# Altium PCB 42CAN.PcbDoc (part 2 of 2)
Units mm, origin at the board's own origin, x right, y up, seen from the top; angles counter-clockwise.
Board outline 42 x 42 mm, 4 copper layers (Top Layer 1 2, GND, Bottom Layer, POWER), stack 0.746 mm thick; 118 components, 90 nets, 420 pads, 193 vias.
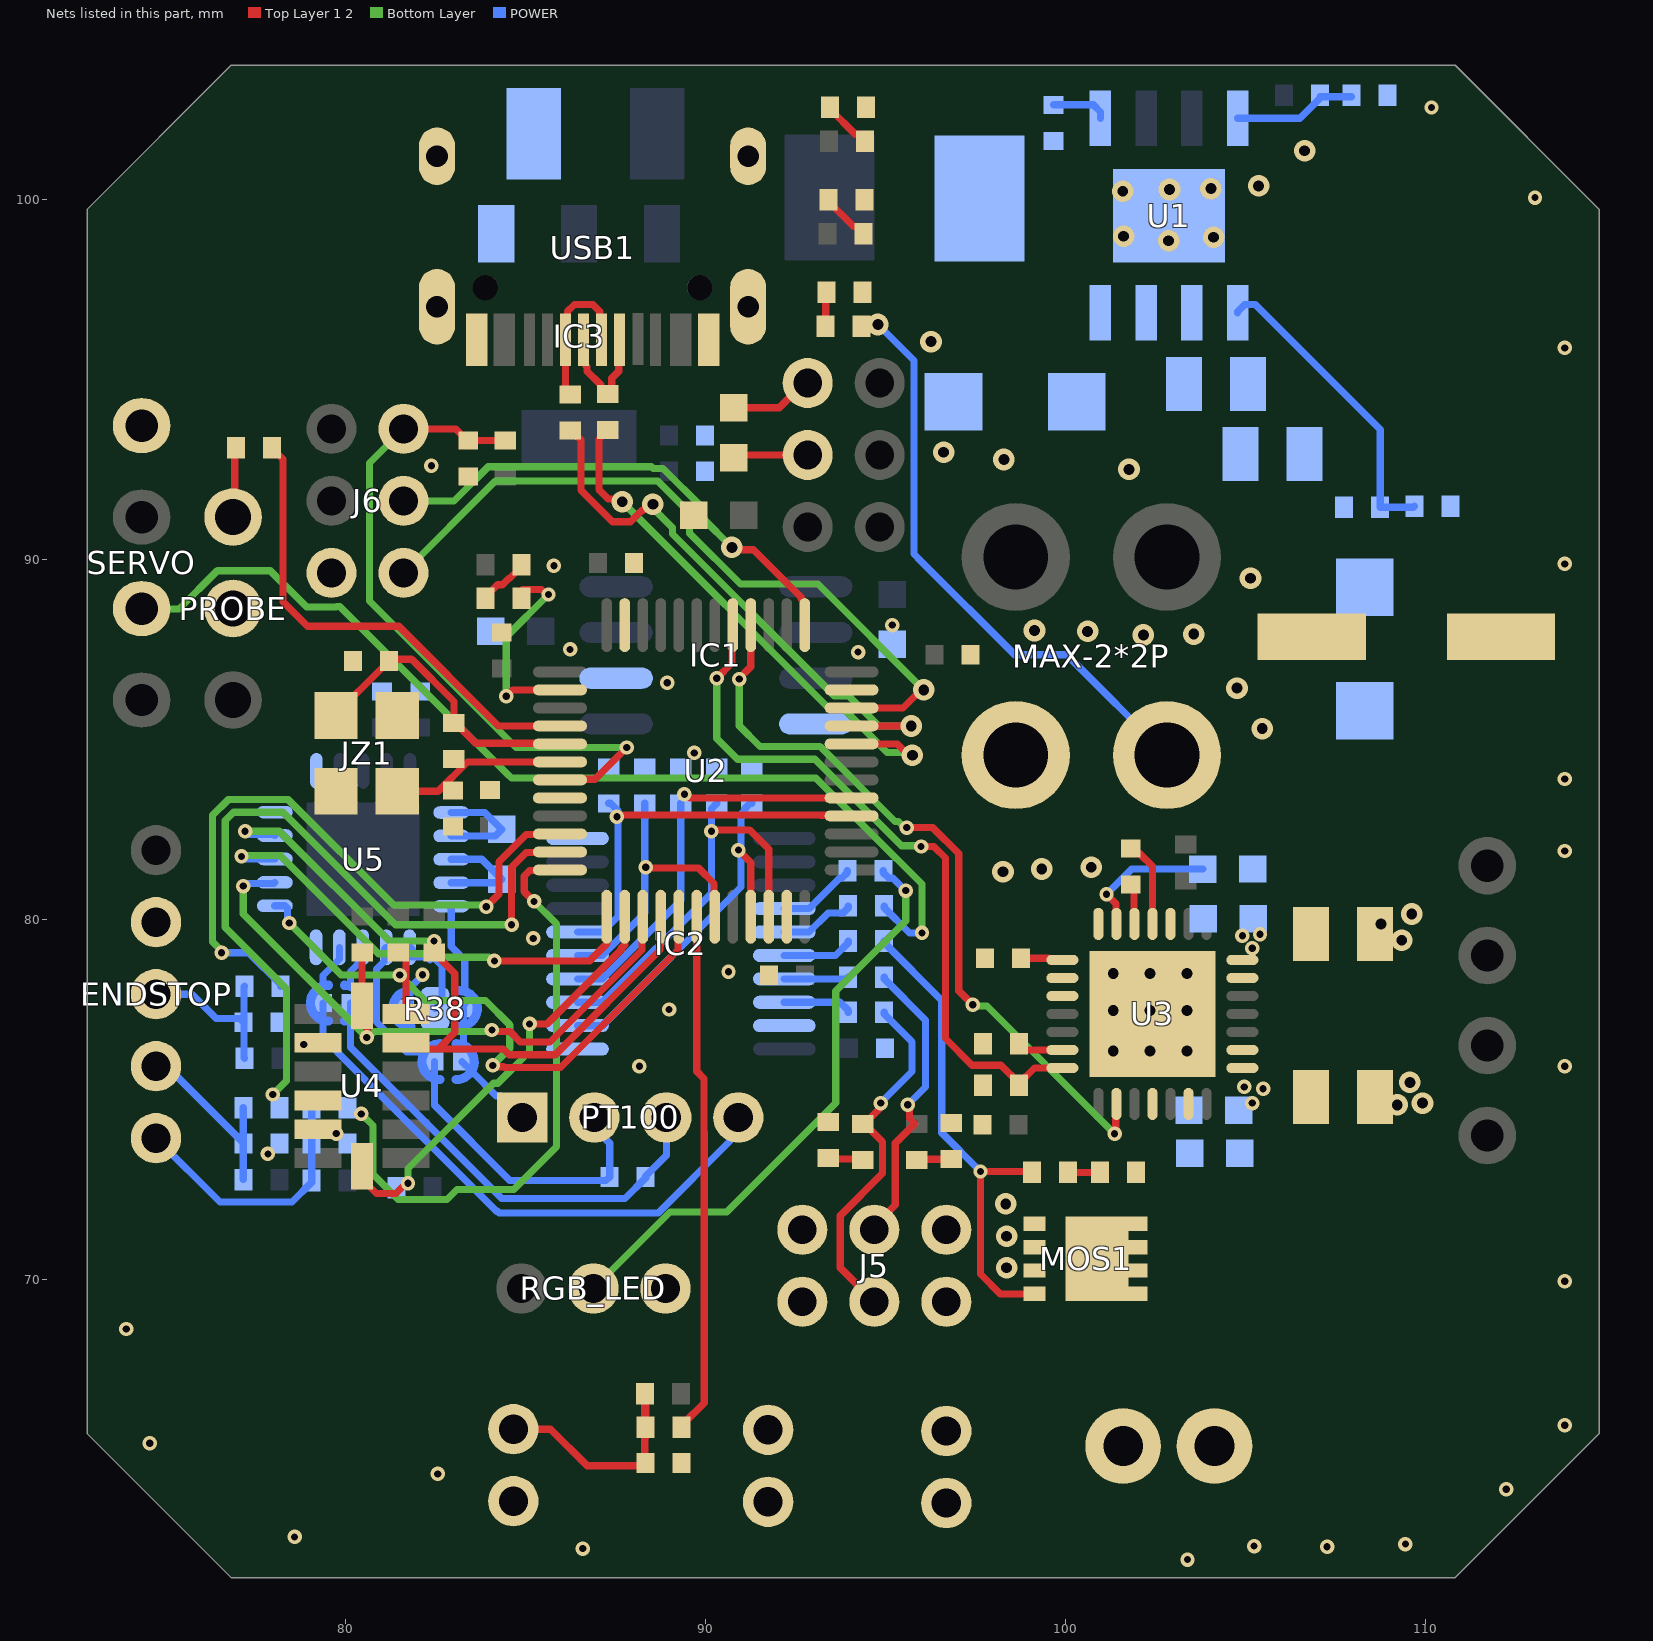
[diagram p3: the nets of this part, all layers, seen from the top]

## Via types
v1: diameter 0.4, hole 0.2, Top Layer 1 2 to POWER, tented both sides, 91 vias
v2: diameter 0.6, hole 0.3, Top Layer 1 2 to POWER, tented both sides, 64 vias
v3: diameter 0.8, hole 0.5, Top Layer 1 2 to POWER, 32 vias
v4: diameter 6.4, hole 3.2, Top Layer 1 2 to POWER, 4 vias
v5: diameter 0.406, hole 0.203, Top Layer 1 2 to POWER, tented both sides, 2 vias

## Nets (pads, with @x,y where several pads share a name; then routed paths per layer and width w, separated by ;. In a path a pad name is that pad's centre, name@x,y a point inside that pad or via, vN(x,y) a via of type N, cw(c..) or ccw(c..) an arc to the next point about the centre after c; other vN are vias at no path point) (continued)
ENDSTOP0: C32.1 ENDSTOP.3 R13.1 R29.1 | length 4.8
  POWER w0.2: ENDSTOP.3@74.75,77.925 75.75,77.925 76.425,77.25 77.078,77.25 C32.1@77.182,77.146 ; R29.1@77.207,76.146 77.195,76.159 77.195,77.134 C32.1@77.182,77.146 ; R13.1@77.207,78.146 77.195,78.134 77.195,77.158 C32.1@77.182,77.146
ENDSTOP1: C34.1 ENDSTOP.4 R14.1 R45.1 | length 5.3
  POWER w0.2: ENDSTOP.4@74.75,75.925 75.05,75.925 C34.1@77.175,73.8 ; R45.1@77.175,72.775 C34.1@77.175,73.775 C34.1@77.175,73.8 ; R14.1@77.175,74.775 C34.1@77.175,73.8
ENDSTOP2: C33.1 ENDSTOP.5 R30.1 R44.1 | length 7.4
  POWER w0.2: ENDSTOP.5@74.75,73.925 76.525,72.15 78.525,72.15 79.075,72.7 R44.1@79.075,72.75 C33.1@79.075,73.775 R30.1@79.075,74.775
FAN0: IC2.2 R23.2 U2.21 | length 10.6
  Top Layer 1 2 w0.2: v1(90.925,81.925) 91.269,81.581 U2.21@91.269,80.075
  POWER w0.2: IC2.2@86.458,77.05 87.147,77.05 91,80.903 91,82.925 91.1,83.025 91.1,83.075 91.25,83.225 R23.2@91.3,83.225
FAN0-BUFF: J5.5 R15.1 R31.1 | length 10.1
  Top Layer 1 2 w0.2: R31.1@94.375,74.325 R31.1@94.425,74.325 ; J5.5@94.7,69.381 93.753,70.329 93.753,71.774 94.928,72.949 94.928,73.823 R31.1@94.425,74.325 ; v5(94.875,74.9) 94.836,74.861 94.836,74.735 R31.1@94.425,74.325
  POWER w0.2: v5(94.875,74.9) 95.75,75.775 95.75,76.6 94.975,77.375 R15.1@94.975,77.425
FAN1: IC2.3 R24.2 U2.22 | length 11.2
  Top Layer 1 2 w0.2: v1(90.175,82.45) 90.213,82.488 91.237,82.488 91.769,81.956 U2.22@91.769,80.075
  POWER w0.2: IC2.3@86.458,77.7 87.147,77.7 90.175,80.728 v1(90.175,82.45) 90.175,83.075 R24.2@90.325,83.225
FAN1-BUFF: J5.2 R19.1 | length 8.3
  Top Layer 1 2 w0.2: J5.2@94.7,71.381 94.7,71.488 95.283,72.071 95.283,73.783 95.825,74.325 95.675,74.475 95.675,74.744 95.625,74.794 v5(95.625,74.85)
  POWER w0.2: R19.1@94.975,78.4 94.975,78.35 96.125,77.2 96.125,75.35 v5(95.625,74.85)
GND: C2.2 C3.2 C4.2 C5.1 C6.2 C9.2 C10.2 C11.1 C12.2 C13.2 C14.2 C15.2 C16.2 C17.2 C18.2 C19.2 C20.2 C21.2 C22.2 C23.2 C24.2 C25.2 C27.1 C28.1 C31.2 C32.2 C33.2 C34.2 D1.1 D2.2 D3.2 D4.2 D5.2 D8.2 D9.2 ENDSTOP.2 IC1.2 IC1.8 IC2.1 IC2.10 IC2.19 IC3.1 J5.3 J5.6 J6.6 JZ1.2 JZ1.4 MAX-2*2P.3 MOS1.1 MOS1.2 MOS1.3 PROBE.2 R5-DNP.1 R7.1 R9.2 R10.2 R11.1 R12.1 R23.1 R24.1 R25.1 R26.1 R27.1 R38.1 R49.2 RGB_LED.3 SERVO.1 TEMP0.2 U1.6 U1.9 U2.8 U2.23 U2.35 U2.47 U3.3 U3.7 U3.9 U3.10 U3.18 U3.20 U3.29 U4.2 U4.4 U4.5 U5.10 U5.15 U5.16 USB1.13 USB1.14 USB1.15 USB1.16 USB1.A1B12 USB1.B1A12 | length 1.1
  POWER w0.2: R38.1@81.664,77.525 81.8,77.661 81.8,78.023 81.8,78.097 82.151,78.448 v1(82.151,78.465)
  other v1: 103.399,62.219 86.6,62.525 105.249,62.594 107.275,62.575 109.45,62.65 78.6,62.85 112.25,64.175 82.575,64.6 74.575,65.45 113.875,65.95 73.925,68.625 113.875,69.95 77.858,73.489 79.754,74.052 88.175,75.925 113.875,75.925 78.854,76.527 89,77.5 90.65,78.55 85.225,79.475 113.875,81.9 113.875,83.9 89.7,84.625 88.95,86.575 94.25,87.425 86.25,87.5 95.2,88.175 85.8,89.825 113.875,89.875 82.4,92.6 113.875,95.875 113.05,100.05 110.175,102.55
  other v2: 98.375,70.325 98.375,71.2 98.35,72.1 109.225,74.85 109.925,74.9 109.575,75.475 101.337,76.349 102.362,76.349 103.387,76.349 101.337,77.474 102.362,77.474 103.387,77.474 101.337,78.499 102.362,78.499 103.387,78.499 109.35,79.425 108.775,79.875 109.625,80.15 98.275,81.325 99.35,81.4 100.725,81.45 102.175,87.9 103.575,87.925 100.625,88 99.15,88.025 105.15,89.475 101.775,92.5 98.3,92.775 96.625,92.975 96.275,96.05 102.875,98.85 104.125,98.95 101.625,98.975 101.6,100.225 102.9,100.275 104.05,100.3 105.375,100.375 106.65,101.35
HEAT0: IC2.4 R25.2 U2.29 | length 11.2
  Top Layer 1 2 w0.2: v1(89.425,83.475) 89.479,83.475 89.579,83.375 U2.29@94.069,83.375
  POWER w0.2: IC2.4@86.458,78.35 87.147,78.35 89.325,80.528 R25.2@89.325,83.225
HEAT0-BUFF: MOS1.4 R20.1 R28.1 | length 13.5
  Top Layer 1 2 w0.2: R28.1@99.075,72.975 99.05,73 v1(97.65,73) 97.65,70.15 98.2,69.6 MOS1.4@99.15,69.6
  POWER w0.2: R20.1@94.975,79.4 94.975,79.35 96.575,77.75 96.575,74.075 v1(97.65,73)
Net1_2: 1.2 C1.2 D1.2 U1.8
NetC1_1: C1.1 U1.1 | length 1.6
  POWER w0.2: C1.1@99.675,102.625 100.78,102.625 100.98,102.425 U1.1@100.98,102.25
NetC3_1: C3.1 C4.1 D6.2 R3-DNP.2 U1.7
NetC5_2: C5.2 JZ1.1 R6.2 U2.5 | length 8.2
  Top Layer 1 2 w0.2: JZ1.1@79.748,85.661 79.748,85.711 81.037,87 81.075,87 81.225,87.15 C5.2@81.225,87.175 ; C5.2@81.275,87.225 81.85,87.225 83.025,86.05 R6.2@83.025,85.45 83.075,85.45 83.631,84.894 84.531,84.894 85.95,84.894 U2.5@85.969,84.875
NetC6_1: C6.1 JZ1.3 R6.1 U2.6 | length 4.9
  Top Layer 1 2 w0.2: JZ1.3@81.448,83.561 82.586,83.561 83.4,84.375 U2.6@85.969,84.375
NetC7_1: C7.1 U3.4 | length 2.4
  Top Layer 1 2 w0.2: C7.1@101.825,81.975 101.975,81.825 102.075,81.825 102.425,81.475 U3.4@102.425,79.875
NetC7_2: C7.2 U3.5 | length 1.1
  Top Layer 1 2 w0.2: C7.2@101.825,80.975 101.91,80.891 101.91,79.89 U3.5@101.925,79.875
NetC8_1: C8.1 U3.6 | length 3.9
  Top Layer 1 2 w0.2: v1(101.15,80.7) 101.409,80.441 101.409,79.89 U3.6@101.424,79.875
  POWER w0.2: v1(101.15,80.7) 101.85,81.4 C8.1@103.825,81.4
NetC12_1: C12.1 U3.8 | length 1.2
  Top Layer 1 2 w0.2: C12.1@98.775,78.925 99.546,78.925 99.595,78.876 U3.8@99.925,78.876
NetC14_1: C14.1 R16.1 R17.2 TEMP0.1 | length 6.9
  Top Layer 1 2 w0.2: TEMP0.1@84.676,65.843 85.707,65.843 86.725,64.825 88.275,64.825 C14.1@88.35,64.9 C14.1@88.35,64.925 ; C14.1@88.325,64.925 88.325,66.6 R16.1@88.35,66.625 ; R17.2@88.35,65.625 R16.1@88.35,66.625 ; R16.1@88.35,66.65 R16.1@88.35,66.625
NetC26_1: C26.1 PT100.2 R39.2 U5.7 | length 12.7
  POWER w0.2: U5.7@81.145,79.225 81.099,79.179 81.099,78.849 80.875,78.625 80.875,77.15 81.705,76.32 82.219,76.32 ; R39.2@82.489,76.05 82.489,75.574 82.489,74.836 84.575,72.75 87.25,72.75 C26.1@87.35,72.85 87.35,73.783 86.925,74.208 PT100.2@86.925,74.5
NetC26_2: C26.2 PT100.3 R40.1 U5.8 | length 14.9
  POWER w0.2: R40.1@80.15,77.675 80.15,77.203 80.15,76.45 84.35,72.25 87.775,72.25 88.35,72.825 C26.2@88.35,72.85 88.35,72.875 88.925,73.45 PT100.3@88.925,74.5 PT100.3@88.925,74.814 ; 80.15,78.147 80.15,78.557 80.491,78.898 80.491,79.221 U5.8@80.495,79.225
NetCJ2_2: CJ2.2 MOS1.5
NetD2_1: D2.1 R28.2 | length 0.9
  Top Layer 1 2 w0.2: R28.2@100.075,72.975 D2.1@100.975,72.975
NetD3_1: D3.1 R31.2 | length 1
  Top Layer 1 2 w0.2: D3.1@93.425,73.375 93.45,73.35 94.35,73.35 R31.2@94.375,73.325
NetD4_1: D4.1 R32.2 | length 1
  Top Layer 1 2 w0.2: R32.2@95.875,73.325 95.889,73.339 96.819,73.339 D4.1@96.833,73.353
NetD5_1: D5.1 R41.1 | length 1.4
  Top Layer 1 2 w0.2: D5.1@93.469,102.56 93.469,102.51 94.169,101.81 94.294,101.81 R41.1@94.444,101.66
NetD7_1: D7.1 R46.2 | length 1.6
  Top Layer 1 2 w0.2: D7.1@83.903,88.917 83.903,88.967 84.233,89.298 84.376,89.298 84.548,89.47 84.569,89.47 84.9,89.8 R46.2@84.9,89.85 ; R46.2@84.812,89.938 R46.2@84.925,90.05
NetD7_2: D7.2 U2.2 | length 5.7
  Top Layer 1 2 w0.2: v1(84.475,86.2) 84.65,86.375 U2.2@85.969,86.375 ; D7.2@84.928,89.167 85.454,89.167 85.596,89.025 v1(85.65,89.025)
  Bottom Layer w0.2: v1(84.475,86.2) 84.475,87.85 v1(85.65,89.025)
NetD8_1: D8.1 R47.1 | length 1
  Top Layer 1 2 w0.2: R47.1@93.35,96.475 93.35,97.4 D8.1@93.375,97.425
NetD9_1: D9.1 R48.1 | length 1.6
  Top Layer 1 2 w0.2: D9.1@93.428,99.992 93.428,99.942 94.12,99.25 94.25,99.25 R48.1@94.4,99.1 ; R48.1@94.4,98.925 R48.1@94.425,98.9 ; R48.1@94.4,98.975 R48.1@94.4,99.1 ; R48.1@94.4,99.05 94.4,99.075 94.425,99.1 R48.1@94.4,99.1
NetFAN0_1: FAN0.1 J5.4
NetFAN1_1: FAN1.1 J5.1
NetIC2_14: IC2.14 R22.2 | length 2.2
  POWER w0.2: IC2.14@92.2,80.3 92.889,80.3 93.739,81.15 93.8,81.15 93.95,81.3 R22.2@93.95,81.35
NetIC2_15: IC2.15 R21.2 | length 2.1
  POWER w0.2: IC2.15@92.2,79.65 92.889,79.65 93.414,80.175 93.825,80.175 93.975,80.325 R21.2@93.975,80.375
NetIC2_16: IC2.16 R20.2 | length 2
  POWER w0.2: IC2.16@92.2,79 93.625,79 93.975,79.35 R20.2@93.975,79.4
NetIC2_17: IC2.17 R19.2 | length 1.8
  POWER w0.2: IC2.17@92.2,78.35 93.925,78.35 R19.2@93.975,78.4
NetIC2_18: IC2.18 R15.2 | length 1.9
  POWER w0.2: IC2.18@92.2,77.7 93.75,77.7 93.975,77.475 R15.2@93.975,77.425
Netj3_2: j3.2 R18.2 | length 2.3
  Top Layer 1 2 w0.2: R18.2@90.802,94.209 92.059,94.209 92.75,94.9 j3.2@92.85,94.9
Netj4_1: j4.1 R18.1 | length 2.1
  Top Layer 1 2 w0.2: R18.1@90.8,92.825 90.875,92.9 j4.1@92.85,92.9
NetPT100_1: PT100.1 R38.3 R39.1 U5.5 | length 5.9
  POWER w0.2: U5.5@82.95,80.369 82.95,79.25 83.325,78.875 83.325,78.126 ; R39.1@83.25,76.05 83.513,75.787 84.2,75.1 84.325,75.1 PT100.1@84.925,74.5 ; 83.294,76.505 83.294,77.151 83.294,77.165 83.294,77.619 R38.3@83.325,77.65
NetPT100_4: PT100.4 R40.2 U5.9 | length 17.1
  POWER w0.2: R40.2@79.389,77.675 79.389,77.199 79.389,76.736 79.798,76.327 79.798,76.304 84.204,71.898 84.227,71.898 84.275,71.85 88.7,71.85 90.695,73.845 90.695,74.27 PT100.4@90.925,74.5 ; 79.389,78.151 79.389,78.446 79.845,78.902 U5.9@79.845,79.225
NetR1_1: R1.1 USB1.A6 USB1.B6 | length 4.2
  Top Layer 1 2 w0.2: R1.1@86.25,94.575 86.125,94.7 USB1.B6@86.125,96.103 86.175,96.152 86.175,96.884 86.37,97.08 86.88,97.08 87.075,96.884 87.075,96.152 USB1.A6@87.125,96.103
NetR2_1: R2.1 USB1.A7 USB1.B7 | length 3.5
  Top Layer 1 2 w0.2: USB1.A7@86.625,96.103 86.675,96.053 86.675,95.4 86.723,95.352 86.723,95.228 87.1,94.85 87.1,94.75 87.25,94.6 87.35,94.6 87.408,94.658 87.408,95.033 87.602,95.227 87.602,96.079 USB1.B7@87.625,96.103
NetR3-DNP_1: R3-DNP.1 R5-DNP.2 U1.5 | length 8.6
  POWER w0.2: U1.5@104.79,96.85 104.79,96.879 104.99,97.079 105.278,97.079 107.05,95.307 108.75,93.607 R3-DNP.1@108.75,91.45 109.675,91.45 R5-DNP.2@109.7,91.475
NetR4_1: R4.1 R7.2 U1.4 | length 3.4
  POWER w0.2: U1.4@104.79,102.25 106.525,102.25 107.075,102.8 107.075,102.85 R7.2@107.95,102.85
NetR9_1: R9.1 U3.27
NetR10_1: R10.1 U3.23
NetR11_2: R11.2 U3.13 | length 1.3
  Top Layer 1 2 w0.2: R11.2@98.725,76.55 98.725,76.524 98.875,76.374 U3.13@99.925,76.374
NetR13_2: R13.2 U2.10 | length 18.6
  Top Layer 1 2 w0.2: v1(83.925,80.35) 84.273,80.698 84.273,81.596 85.032,82.356 85.95,82.356 U2.10@85.969,82.375
  Bottom Layer w0.2: v1@76.725,79.075 v1(76.573,79.075) 76.573,79.129 76.32,79.382 76.32,82.894 76.754,83.327 78.423,83.327 81.35,80.4 v1@83.984,80.4
  POWER w0.2: v1(76.573,79.075) 77.328,79.075 78.207,78.196 R13.2@78.207,78.146
NetR14_2: R14.2 U2.11 | length 20.9
  Top Layer 1 2 w0.2: v1(84.625,79.85) 84.625,81.45 85.031,81.856 85.95,81.856 U2.11@85.969,81.875
  Bottom Layer w0.2: v1(77.992,75.138) 78.375,75.521 78.375,78.075 76.673,79.777 76.673,82.748 76.9,82.975 78.275,82.975 81.4,79.85 82.285,79.85 82.288,79.852 82.662,79.852 82.665,79.85 v1(84.625,79.85)
NetR30_2: R30.2 U2.12 | length 16.8
  Top Layer 1 2 w0.2: v1(85.25,80.5) 84.977,80.773 84.977,81.208 85.125,81.356 85.931,81.356 U2.12@85.96,81.385
  Bottom Layer w0.2: v1(80.45,74.6) 80.775,74.275 80.775,72.925 81.477,72.223 82.833,72.223 83.113,72.502 84.684,72.502 85.877,73.695 85.877,79.873 v1(85.25,80.5)
NetR37_1: R37.1 U5.1 U5.2 | length 3.1
  POWER w0.2: U5.2@82.95,82.32 84.17,82.32 R37.1@84.35,82.5 83.88,82.97 U5.1@82.95,82.97
NetR37_2: R37.2 U5.3 U5.4 | length 3.1
  POWER w0.2: U5.4@82.95,81.02 84.256,81.02 R37.2@84.352,81.116 83.797,81.67 U5.3@82.95,81.67
NetR38_2: R38.2 U5.6 | length 2.3
  POWER w0.2: U5.6@81.795,79.225 81.865,79.156 81.865,78.965 82.27,78.965 82.362,78.873 ; R38.2@82.5,77.525 82.692,77.717 82.692,78.708 82.527,78.873
NetR43_2: R43.2 U2.4 | length 13.5
  Top Layer 1 2 w0.2: R43.2@77.975,93.1 77.975,93.05 78.125,92.9 78.158,92.9 78.275,92.783 78.275,88.825 78.959,88.141 81.491,88.141 84.258,85.375 U2.4@85.969,85.375
PROBE: PROBE.1 R43.1 | length 2.1
  Top Layer 1 2 w0.2: PROBE.1@76.95,91.005 76.938,91.017 76.938,93.063 R43.1@76.975,93.1
RESET: C31.1 J6.3 R42.2 U2.7 | length 19.5
  Top Layer 1 2 w0.2: J6.3@81.625,93.625 83.075,93.625 83.4,93.3 C31.1@83.425,93.3 ; C31.1@83.256,93.15 83.406,93.3 C31.1@83.425,93.3 ; R42.2@84.5,93.3 C31.1@83.425,93.3 ; U2.7@85.969,83.875 85.988,83.894 86.944,83.894 v1(87.825,84.775)
  Bottom Layer w0.2: J6.3@81.625,93.625 80.678,92.678 80.678,88.847 84.75,84.775 v1(87.825,84.775)
RGB: IC2.6 R27.2 U2.28 | length 11.1
  Top Layer 1 2 w0.2: v1(87.55,82.85) 87.604,82.85 87.657,82.902 93.221,82.902 93.229,82.894 94.05,82.894 U2.28@94.069,82.875
  POWER w0.2: IC2.6@86.458,79.65 87.147,79.65 87.581,80.084 87.581,83.019 87.375,83.225 R27.2@87.325,83.225
RGB-BUFF: R22.1 RGB_LED.2 | length 16.4
  Bottom Layer w0.2: RGB_LED.2@86.9,69.75 89.025,71.875 90.6,71.875 93.63,74.905 93.63,78.011 95.573,79.954 v1(95.573,80.8)
  POWER w0.2: R22.1@94.95,81.35 94.95,81.3 95.1,81.15 95.216,81.15 95.566,80.8 v1(95.573,80.8)
SERVO: IC2.5 R26.2 U2.19 | length 8.4
  Top Layer 1 2 w0.2: v1@88.35,81.425 89.827,81.425 90.25,81.002 90.25,80.094 U2.19@90.269,80.075
  POWER w0.2: IC2.5@86.458,79 87.147,79 88.325,80.178 R26.2@88.325,83.225
  other v1: 88.35,81.45
SERVO0-BUFF: R21.1 SERVO.3 | length 28.5
  Bottom Layer w0.2: SERVO.3@74.35,88.635 74.36,88.625 75.392,88.625 76.454,89.687 77.925,89.687 78.935,88.678 79.765,88.678 79.765,88.688 79.779,88.688 79.862,88.688 84.564,83.986 ; 84.564,83.986 84.623,83.927 93.074,83.927 95.308,81.693 95.319,81.693 96.025,80.987 v1(96.025,79.625)
  POWER w0.2: R21.1@94.975,80.375 94.975,80.325 95.675,79.625 v1(96.025,79.625)
SPI1_CS0: U2.13 U5.13 | length 13.3
  Top Layer 1 2 w0.2: v1(84.15,78.85) 86.794,78.85 87.269,79.325 U2.13@87.269,80.075
  Bottom Layer w0.2: v1(77.125,81.75) 77.15,81.775 78.2,81.775 80.927,79.048 82.188,79.048 82.288,78.948 83.998,78.948 84.096,78.85 v1(84.15,78.85)
  POWER w0.2: v1(77.125,81.75) 77.179,81.75 77.249,81.68 U5.13@78.05,81.68
SPI1_CS1: R36.1 U2.14 U4.7 | length 12.2
  Top Layer 1 2 w0.2: U4.7@80.47,73.145 80.47,72.795 80.877,72.388 81.408,72.388 81.696,72.675 v1(81.75,72.675) ; v1(85.125,77.1) 85.613,77.1 87.672,79.158 87.672,79.2 87.769,79.298 U2.14@87.769,80.075
  Bottom Layer w0.2: v1(81.75,72.675) 81.75,73.082 84.12,75.452 84.245,75.452 85.125,76.333 v1(85.125,77.1)
SPI1_MISO: R35.2 U2.16 U4.12 U5.14 | length 19.8
  Top Layer 1 2 w0.2: U4.12@81.69,76.575 81.865,76.4 82.609,76.4 84.4,76.4 84.557,76.243 85.841,76.243 88.75,79.152 88.75,80.056 U2.16@88.769,80.075 ; R35.2@82.475,79.075 82.525,79.075 82.675,78.925 82.675,78.875 83.05,78.5 83.05,76.859 82.6,76.409
  Bottom Layer w0.2: v1(77.225,82.45) 78.175,82.45 81.225,79.4 v1(82.475,79.4)
  POWER w0.2: v1(77.225,82.45) 77.279,82.45 77.37,82.359 78.021,82.359 U5.14@78.05,82.33
SPI1_MOSI: R34.2 U2.17 U4.13 U5.11 | length 18.7
  Top Layer 1 2 w0.2: R34.2@81.475,79.075 81.525,79.075 81.69,78.91 U4.13@81.69,77.375 ; v1(84.1,75.948) 84.138,75.909 84.392,75.909 84.411,75.89 85.987,75.89 89.25,79.153 89.25,80.056 U2.17@89.269,80.075
  Bottom Layer w0.2: v1(78.45,79.9) 79.896,78.454 v1(81.517,78.454) 82.221,77.75 83.9,77.75 84.578,77.072 84.578,76.425 v1(84.1,75.948)
  POWER w0.2: U5.11@78.05,80.38 78.333,80.38 78.402,80.31 78.402,80.002 78.45,79.954 v1(78.45,79.9)
SPI1_SCK: R33.2 U2.15 U4.14 U5.12 | length 18.8
  Top Layer 1 2 w0.2: R33.2@80.475,79.075 80.47,79.07 U4.14@80.47,77.605 80.602,77.473 v1(80.602,76.725) ; v1(84.08,76.93) 84.118,76.892 84.572,76.892 84.869,76.595 85.695,76.595 88.25,79.15 88.25,80.056 U2.15@88.269,80.075
  Bottom Layer w0.2: v1(77.175,80.925) 77.175,80.152 v1(80.602,76.725) 80.653,76.725 80.82,76.892 84.042,76.892 v1(84.08,76.93)
  POWER w0.2: v1(77.175,80.925) 77.229,80.925 77.305,81.001 78.021,81.001 U5.12@78.05,81.03
STEP: U2.40 U3.16 | length 21.1
  Top Layer 1 2 w0.2: v1@90.9,86.65 91.269,87.019 U2.40@91.269,88.175 ; v1@95.625,82.55 96.327,82.55 97.048,81.829 97.048,78.017 v1(97.432,77.632) ; v1(101.375,74.05) 101.409,74.084 101.409,74.859 U3.16@101.424,74.875
  Bottom Layer w0.2: v1(90.95,86.675) 90.95,85.377 91.525,84.802 93.196,84.802 95.276,82.723 95.373,82.723 95.546,82.55 v1(95.6,82.55) ; v1(97.432,77.632) 97.471,77.594 97.831,77.594 v1(101.375,74.05)
SWCLK: J6.2 U2.37 | length 13.4
  Top Layer 1 2 w0.2: v2(90.745,90.333) 90.81,90.268 91.345,90.268 92.672,88.942 92.672,88.9 92.75,88.821 U2.37@92.75,88.673
  Bottom Layer w0.2: J6.2@81.625,91.625 83.025,91.625 83.975,92.575 88.503,92.575 88.551,92.527 88.833,92.527 89.92,91.44 89.92,91.158 v2(90.745,90.333)
SWDIO: J6.1 U2.34 | length 20.5
  Top Layer 1 2 w0.2: U2.34@94.069,85.875 95.494,85.875 95.994,86.375 v2(96.075,86.375)
  Bottom Layer w0.2: J6.1@81.625,89.625 84.175,92.175 88.687,92.175 89.568,91.294 89.568,90.729 90.983,89.313 93.137,89.313 v2(96.075,86.375)
"T0 TEMP": R17.1 U2.18 | length 14.5
  Top Layer 1 2 w0.2: R17.1@89.35,65.9 89.35,65.95 89.673,66.273 89.679,66.273 89.975,66.568 89.975,74.103 89.973,74.106 89.973,75.577 89.769,75.781 U2.18@89.769,80.075
UART: R12.2 U2.41 U3.14 | length 20.1
  Top Layer 1 2 w0.2: v1(90.325,86.7) 90.75,87.125 90.75,88.156 U2.41@90.769,88.175 ; v1(96,82.025) 96.353,82.025 96.675,81.703 96.675,76.693 97.416,75.953 98.222,75.953 R12.2@98.725,75.45 ; R12.2@98.725,75.4 R12.2@98.725,75.45 ; U3.14@99.925,75.874 99.149,75.874 R12.2@98.725,75.45
  Bottom Layer w0.2: v1(90.325,86.7) 90.325,85.025 90.9,84.45 93.05,84.45 95.454,82.046 95.979,82.046 v1(96,82.025)
"USB DM": R2.2 U2.32 | length 15.4
  Top Layer 1 2 w0.2: R2.2@87.3,93.6 87.25,93.6 87.1,93.45 87.1,93.383 87.05,93.333 87.05,91.94 87.313,91.677 87.623,91.677 v2(87.7,91.6) ; U2.32@94.069,84.875 95.336,84.875 95.651,84.56 v2(95.76,84.56)
  Bottom Layer w0.2: v2(87.7,91.6) 93.44,85.86 93.837,85.86 95.061,84.636 95.683,84.636 v2(95.76,84.56)
"USB DP": R1.2 U2.33 | length 15.9
  Top Layer 1 2 w0.2: R1.2@86.3,93.575 86.55,93.325 86.55,91.925 87.427,91.048 87.929,91.048 88.231,91.35 88.263,91.35 88.443,91.53 v2(88.551,91.53) ; U2.33@94.069,85.375 v2@95.726,85.374
  Bottom Layer w0.2: v2(88.551,91.53) 88.551,91.422 89.092,90.881 89.092,90.706 93.586,86.212 93.983,86.212 94.821,85.374 v2(95.726,85.374)
VCC: C8.2 C9.1 C10.1 C11.2 C22.1 CJ2.1 D6.1 FAN0.2 FAN1.2 MAX-2*2P.4 R47.2 U3.22 U3.28 | length 16.1
  POWER w0.2: v2(94.8,96.525) 95.8,95.525 95.8,90.15 96,89.95 98.6,87.35 100.043,87.35 MAX-2*2P.4@102.829,84.565
  other v1: 105.2,74.9 105.5,75.3 104.975,75.35 105.2,79.2 104.925,79.55 105.412,79.588
  other v2: 105.475,85.3 104.775,86.425
pads on no net: IC2.7 IC2.8 IC2.9 IC2.11 IC2.12 IC2.13 R32.1 U1.2 U1.3 U2.3 U2.26 U2.27 U2.30 U2.31 U2.42 U2.43 U3.12 U3.17 U3.25 U4.3 U4.8 U4.9 U4.10 U4.11 U5.17 U5.18 U5.21 USB1. USB1.A5 USB1.A8 USB1.B5 USB1.B8
copper on no net:
  other v3: 78.335,64.822 109.335,64.822 76.638,65.525 80.032,65.525 107.638,65.525 111.032,65.525 75.935,67.222 80.735,67.222 106.935,67.222 111.735,67.222 76.638,68.919 80.032,68.919 107.638,68.919 111.032,68.919 78.335,69.622 109.335,69.622 78.335,95.822 109.335,95.822 76.638,96.525 80.032,96.525 107.638,96.525 111.032,96.525 75.935,98.222 80.735,98.222 106.935,98.222 111.735,98.222 76.638,99.919 80.032,99.919 107.638,99.919 111.032,99.919 78.335,100.622 109.335,100.622
  other v4: 78.335,67.222 109.335,67.222 78.335,98.222 109.335,98.222

## Polygon pours and split planes (outlines as drawn)
GND on Top Layer 1 2 "+5" (solid, remove dead copper, pour order 29): 76.9,61.725 72.9,65.725 72.825,65.725 72.825,99.625 76.925,103.725 76.95,103.7 110.85,103.7 114.8,99.75 114.8,65.675 110.825,61.7
+5V on Top Layer 1 2 "+5" (solid, pour order 24): 76.3,95 73.075,95 72.925,95.15 72.925,99.725 76.925,103.725 76.95,103.7 89.725,103.7 89.725,99.45 89.7,99.425 81.525,99.425 81.475,99.375
+5V on Top Layer 1 2 "+5" (solid, pour order 20): 73.075,83.15 73.075,71.65 74.3,70.425 79.875,70.425 81.9,68.4 85,68.4 85.8,69.2 85.8,70.775 84.95,71.625 81.325,71.625 80,72.95 78.775,72.95 77.8,73.925 77.8,82.05 76.65,83.2
VCC on Top Layer 1 2 "NETR" (solid, pour order 13): 104.512,76.112 104.325,75.925 104.325,75.075 105,74.4 106.148,74.4 106.275,74.527 106.275,75.125 105.233,76.167 105.233,76.172
A+ on Top Layer 1 2 "B+" (solid, pour order 7): 104.55,76.7 105.516,76.7 105.666,76.55 105.875,76.55 106.45,75.975 110.625,75.975 110.925,75.675 111.675,75.675 111.675,77.275 111.525,77.425 105.541,77.425 105.516,77.45 105.141,77.075 104.55,77.075 104.5,77.025 104.475,77.025 104.475,76.8
NetCJ2_2 on Top Layer 1 2 "+5" (solid, pour order 26): 99.9,71.825 99.9,65.025 101.35,63.575 105.525,63.575 105.525,71.025 104.675,71.875
A- on Top Layer 1 2 "NETR" (solid, pour order 12): 103.775,75.3 103.775,73.35 104.7,72.425 111.45,72.425 111.975,72.95 111.975,74.425 111.675,74.725 111.325,74.725 110.75,74.15 105.25,74.15 104.175,75.225 104.175,75.325
B- on Top Layer 1 2 "NETR" (solid, pour order 11): 103.775,79.55 103.75,79.575 103.75,80.725 105.325,82.3 111.75,82.3 111.75,80.7 111.7,80.65 110.025,80.65 110,80.675 105.425,80.675 104.25,79.5 104.075,79.5
B+ on Top Layer 1 2 "NETR" (solid, pour order 9): 104.549,78.349 104.549,77.476 104.575,77.45 110.65,77.45 111.376,78.176 111.775,78.176 111.775,79.9 111.725,79.95 110.6,79.95 109.325,78.675 106.25,78.675
NetR10_1 on Top Layer 1 2 "NETR" (solid, pour order 8): 104.55,76.7 104.45,76.6 104.45,76.175 104.575,76.05 105.375,76.05 106.4,75.025 106.55,75.025 106.85,75.325 106.931,75.628 106.225,76 105.675,76.55 105.467,76.55
NetR9_1 on Top Layer 1 2 "B+" (solid, pour order 5): 104.496,78.525 105.225,78.525 106.425,80.125 106.875,79.825 106.975,79.025 106.975,78.852 106.489,78.852 105.451,78.176 104.549,78.176 104.475,78.275
VCC on Top Layer 1 2 "+5" (solid, pour order 27): 102.9,83.075 106.025,83.075 108.675,85.725 108.675,88.25 108.175,88.75 105.4,88.75 103.2,86.55 102.375,86.55 101.225,85.4 101.225,84.55
NetFAN0_1 on Top Layer 1 2 "+5" (solid, pour order 21): 90.925,65.05 90.6,65.375 90.6,69.25 91.5,70.15 92.975,70.15 93.475,69.65 93.475,66.075 92.375,64.975 92.2,64.975
VCC on Top Layer 1 2 "VCC_L01_P001" (solid, pour order 1): 104.425,78.725 104.45,78.75 105.275,78.75 105.85,79.325 105.85,80.05 105.7,80.2 105.125,80.2 104.375,79.45 104.375,78.95
VCC on POWER "VCC_L04_P032" (solid, pour order 32): 101.425,86.6 101.425,82.633 101.858,82.2 104.275,82.2 104.6,81.875 104.6,73.325 98.2,66.925 98.2,65.95 97.075,64.825 90.9,64.825 90.575,64.5 90.575,62.275 90.825,62.025 102.476,62.025 102.494,62.007 103.307,62.007 105.725,64.424 105.725,68.65 108.1,71.025 108.4,71.025 110.552,73.177 110.552,86.548 110.075,87.025 101.75,87.025
GND on POWER "+5" (solid, remove dead copper, pour order 30): 76.9,61.725 72.9,65.725 72.825,65.725 72.825,99.625 76.925,103.725 76.95,103.7 110.85,103.7 114.8,99.75 114.8,65.675 110.825,61.7
NetFAN1_1 on POWER "+5" (solid, pour order 22): 96.175,72.025 97.275,72.025 97.9,71.4 97.9,65.65 97.075,64.825 95.625,64.825 95.4,65.05 95.4,71.325 95.775,71.7
+5V on POWER "NETR" (solid, pour order 18): 72.95,95.775 72.95,81.6 73.825,80.725 75.525,80.725 76.45,81.65 76.45,83.525 76.918,83.525 78.44,85.047 78.44,92.29 78.8,92.65 80.4,92.65 80.775,93.025 80.775,94.575 76.025,95.775
+5V on POWER "NETR" (solid, pour order 17): 88.075,98.15 95.35,98.15 95.525,98.325 95.525,102.275 95,102.8 88.275,102.8 87.875,102.4 87.875,98.725
Net1_2 on POWER "NETR" (solid, pour order 16): 96.25,101.9 100,101.9 100.225,101.675 100.225,99.1 101.4,97.925 101.4,93.6 101.25,93.45 98.675,93.45 98.275,93.85 98.275,95.825 96.25,97.85 96.25,98.425
+3.3V on POWER "+5" (solid, pour order 23): 83.85,96.55 89.375,96.55 89.525,96.4 89.525,92.3 89.3,92.075 84.125,92.075 83.625,92.575 83.625,96.3
NetC3_1 on POWER "NETR" (solid, pour order 15): 109.175,88.5 106.975,88.5 101.55,93.925 101.55,97.75 101.9,98.1 102.725,98.1 102.95,97.875 102.95,96.075 103.575,95.45 103.575,93.925 106.25,91.25 107.975,91.25 109.125,90.1
GND on GND "+5" (solid, pour order 28): 76.9,61.725 72.9,65.725 72.825,65.725 72.825,99.625 76.925,103.725 76.95,103.7 110.85,103.7 114.8,99.75 114.8,65.675 110.825,61.7
GND on Bottom Layer "+5" (solid, remove dead copper, pour order 31): 76.9,61.725 72.9,65.725 72.825,65.725 72.825,99.625 76.925,103.725 76.95,103.7 110.85,103.7 114.8,99.75 114.8,65.675 110.825,61.7

## Keep-outs
Keep-Out Layer:
  the board outline again, w0.254

## Silkscreen, mask and mechanical layers (free items; w line width, h text height)
Top Overlay:
  lines w0.08: 74.35,86.095 76.89,86.095
  text "3.3V" at 93.1,103.011 h1.02
  text "5V" at 93.4,100.461 h1.02
  text "POWER" at 92.425,97.908 h0.8
Bottom Overlay:
  lines w0.125: 82.725,90.238 86.225,90.238 ; 82.725,91.338 86.25,91.338 ; 84.425,89.388 84.425,92.313 ; 82.725,89.337 82.725,92.313 86.25,92.313 86.25,89.337 82.725,89.337
  text "G" at 74.625,99.043 h1.2
  text "5V" at 74.625,97.712 h1.2
  text "B.1" at 74.625,96.35 h1.2
  text "3.3V" at 75.05,95.188 h1.2
  text "C.15" at 77.95,94.087 h1.2
  text "G" at 77.925,93.062 h1.2
  text "B.2" at 77.95,92.112 h1.2
  text "L" at 98.85,91.85 h1.3
  text "H" at 102.45,91.85 h1.3
  text "5V" at 84.025,91.596 h0.8
  text "RST" at 86,91.596 h0.8
  text "CLK" at 86,90.596 h0.8
  text "3.3V" at 84.25,90.496 h0.8
  text "DIO" at 86,89.546 h0.8
  text "G" at 83.875,89.521 h0.8
  text "GND" at 100.22,86.465 h1.52
  text "VCC" at 104.274,86.465 h1.52
  text "5V" at 74.675,72.087 h1.2
  text "G" at 74.675,71.062 h1.2
  text "A.0" at 74.675,69.995 h1.2
  text "A.1" at 74.675,69 h1.2
  text "-" at 88.75,68.132 h1.52
  text "A.2" at 74.675,68.05 h1.2
  text "B.10 +" at 88.15,67.916 h1.52
  text "A.8" at 103.675,66.762 h1.2
  text "B.0" at 82.716,66.55 h1.52 r270
  text "B.10" at 94.638,65.675 h1.2 r90
  text "-" at 90.818,65.6 h1.52 r90
  text "B.11" at 99.3,65.6 h1.2 r90
  text "-" at 95.89,65.574 h1.52 r90
  text "+" at 104.5,64.157 h1.52 r180
  text "-" at 101.775,63.968 h1.52 r180
  text "-" at 83.918,63.575 h1.52 r90
  text "+" at 90.957,63.475 h1.52 r90
  text "+" at 96.029,63.449 h1.52 r90
Top Solder:
  text "FLY" at 107.35,92.475 h3
Mechanical 1:
  text "感谢Huvud制作的初代CAN工具板,以及对我们的帮助" at 61.4,131.831 h3
  text "为了尊重Huvud，同样将此产品开源" at 71.4,128.873 h3
  text "https://github.com/bondus/KlipperToolboard" at 69.305,126.121 h3
  text "产品链接:  https://item.taobao.com/item.htm?spm=a2oq0.12575281.0.0.579e1debQD9T04&ft=t&id=671792739826" at 59,123.383 h3
  text "Thanks to Huvud for the original CAN tool board,and for helping us" at 53.25,116.689 h3
  text "In order to respect Huvud, this product is also open sourced" at 56.925,113.658 h3
  text "https://github.com/bondus/KlipperToolboard" at 65.975,110.964 h3
  text "Product Links:  https://nl.aliexpress.com/item/1005004048980837.html" at 53,106.708 h3

## Text inside footprints (layer, text, board x,y; h text height)
C2: Bottom Overlay "+" at 90.887,101.3 h1.02
CJ2: Mechanical 15 "J6" at 102.08,66.875 h1